# Altium PCB datn_pcb.PcbDoc
Units mm, origin at the board's own origin, x right, y up, seen from the top; angles counter-clockwise.
Board outline 105 x 90 mm, 2 copper layers (Top Layer, Bottom Layer); 49 components, 44 nets, 218 pads, 18 vias.
Unrouted connection lines stored in the file: 9.
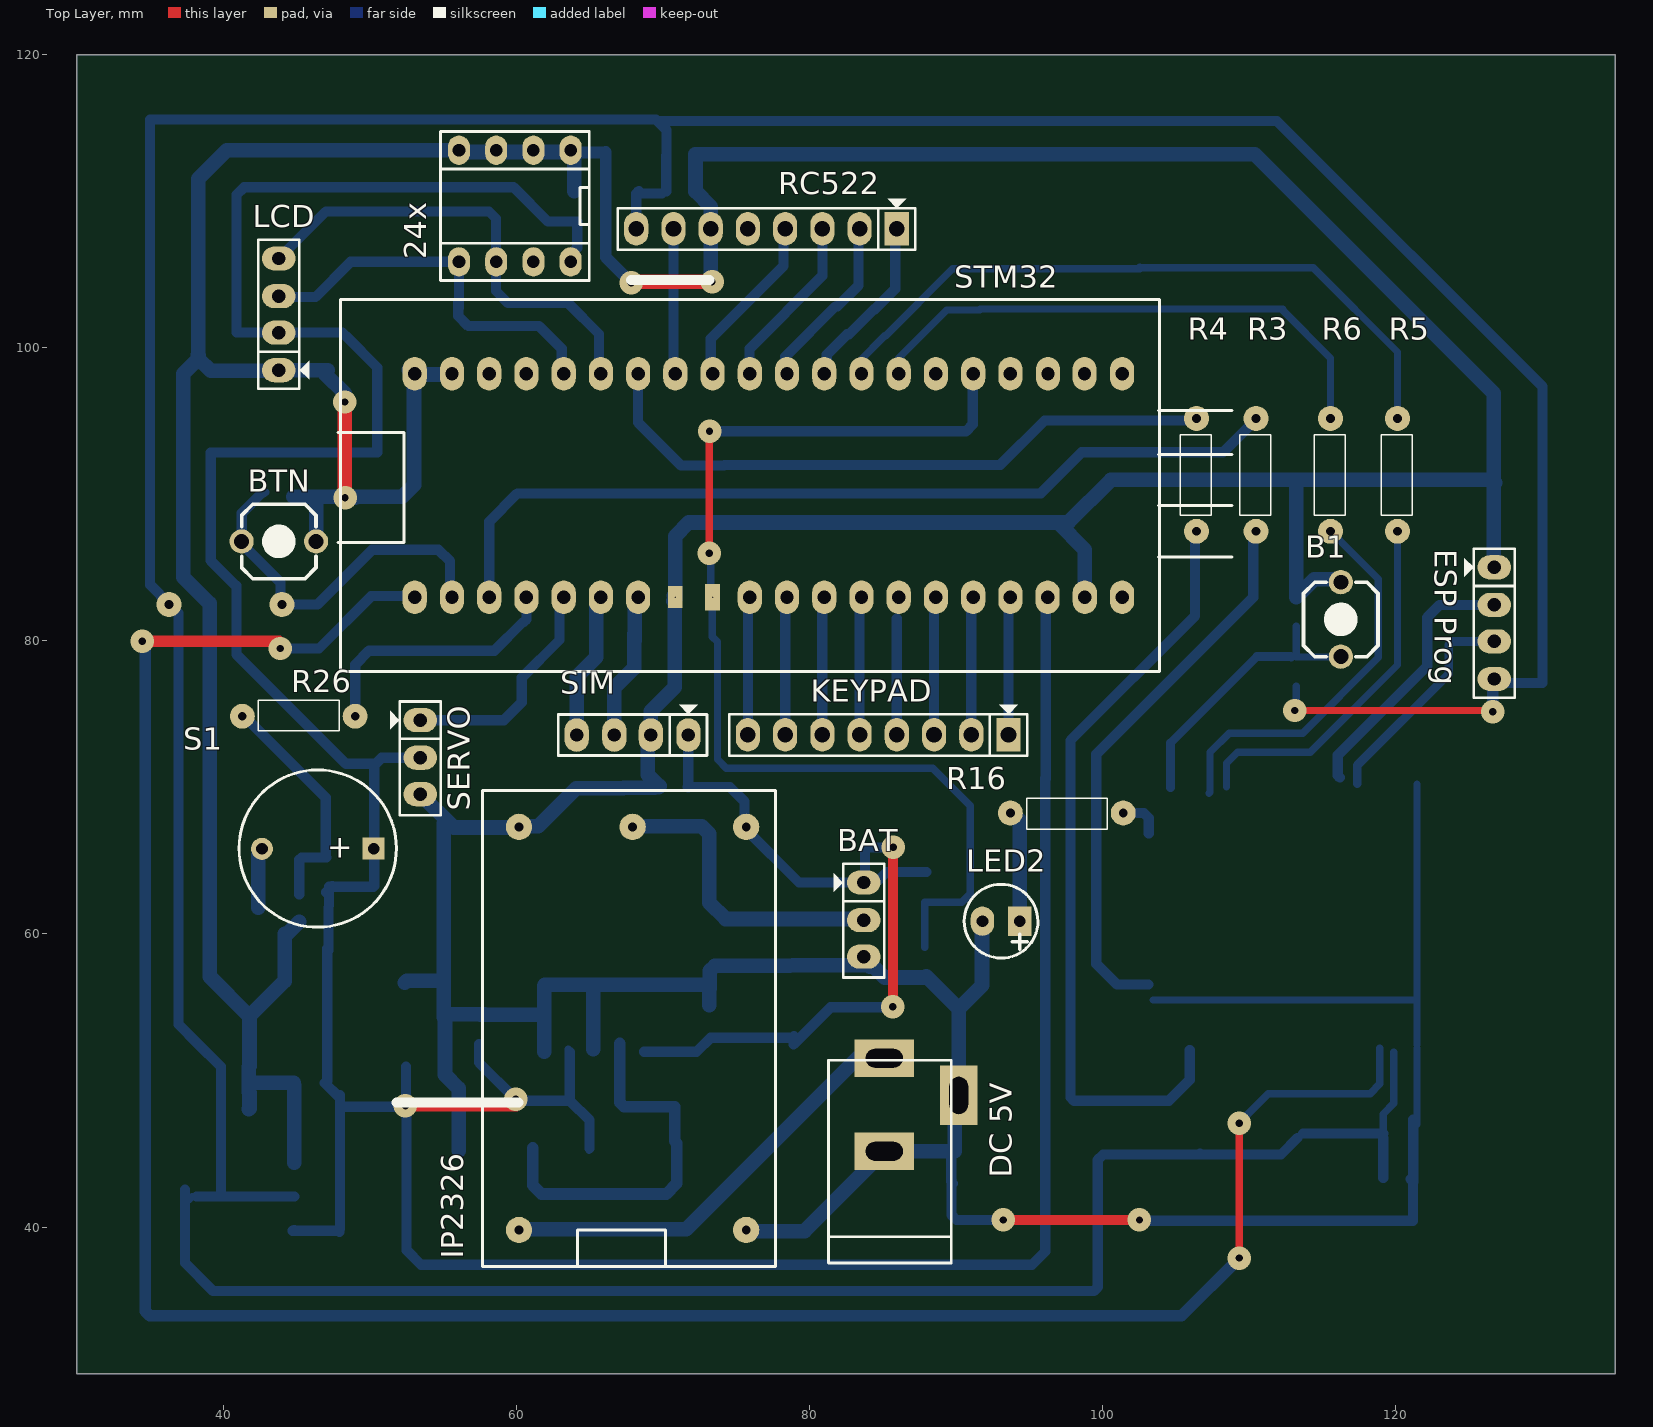
[diagram p0: Top Layer view]
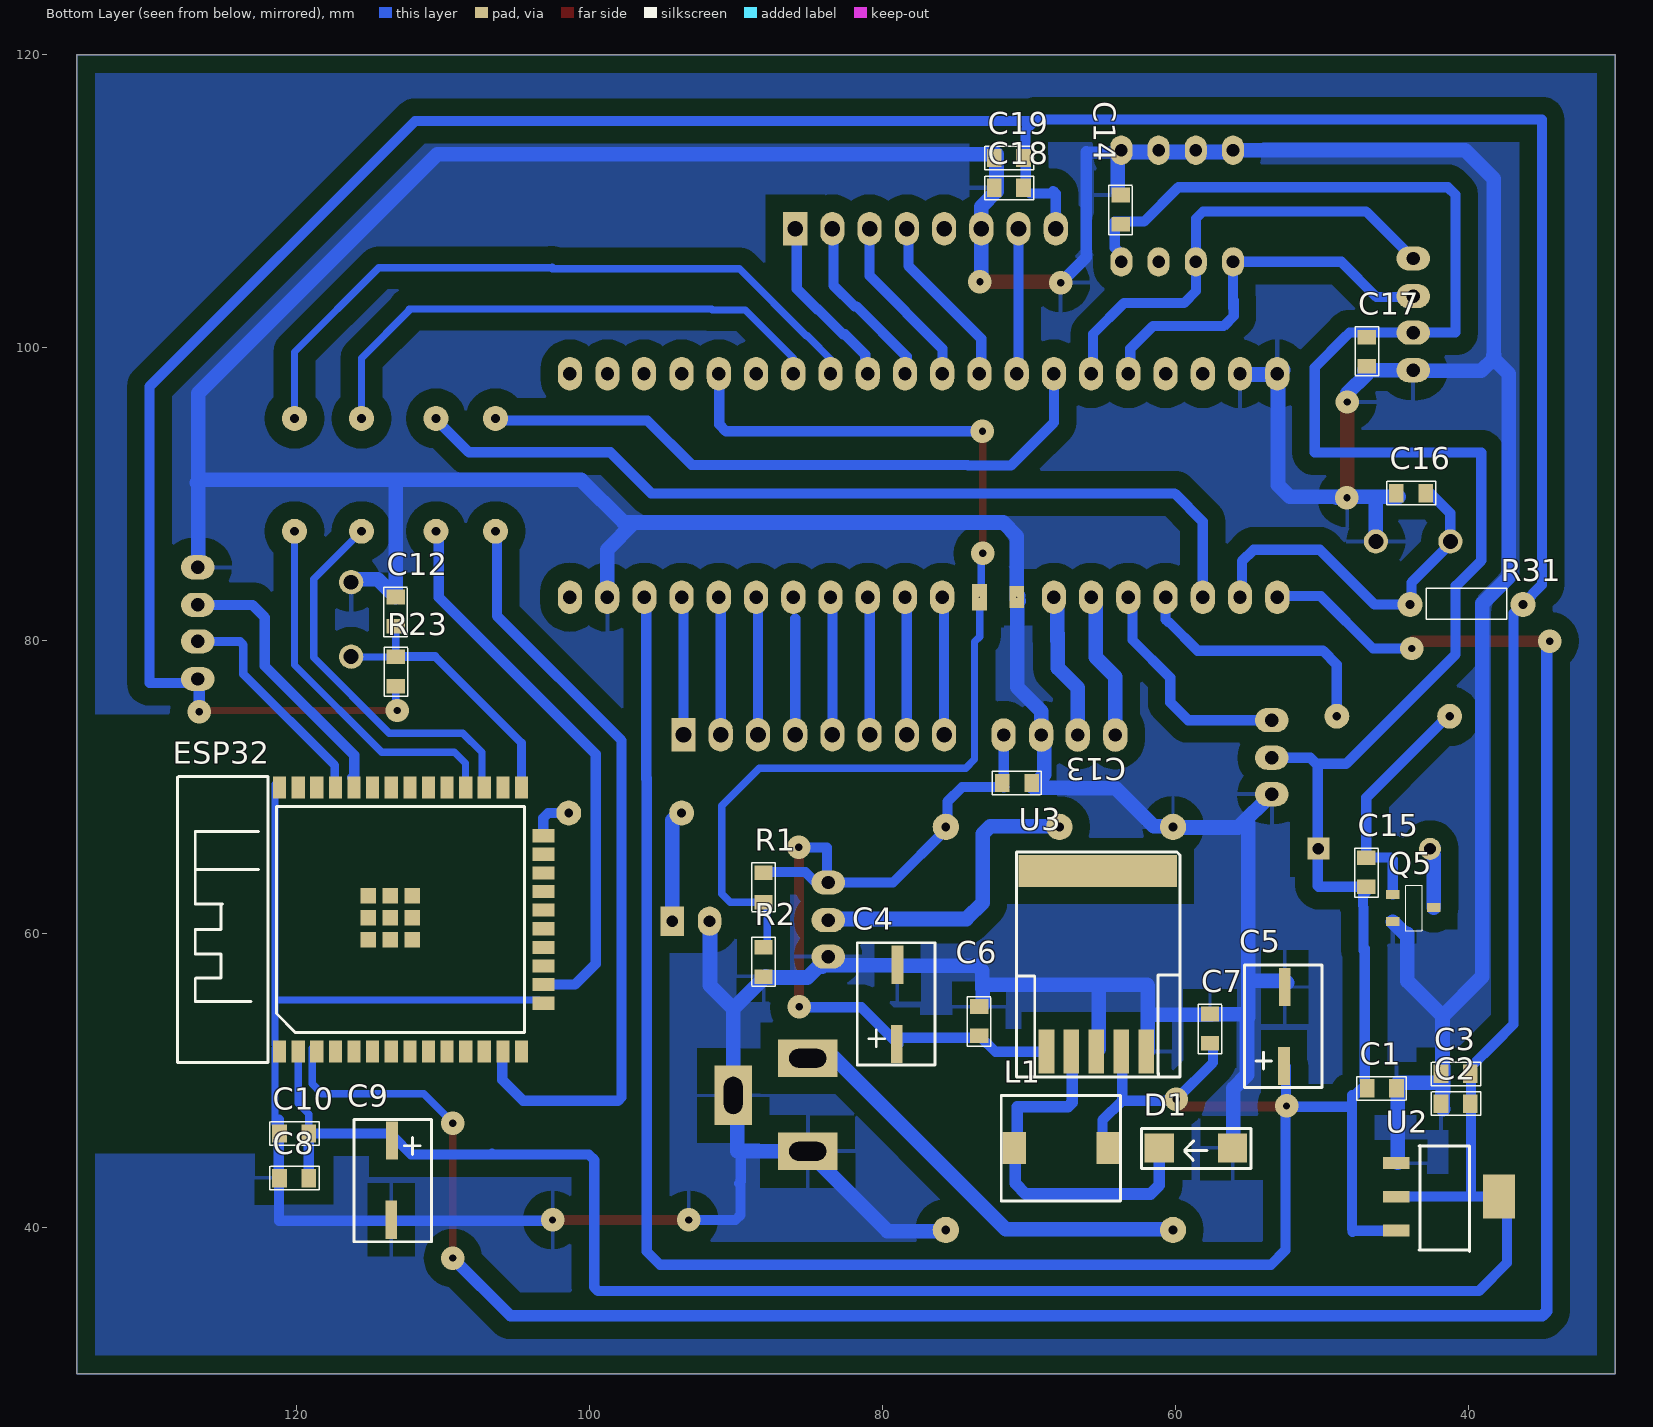
[diagram p1: Bottom Layer view, seen from below]
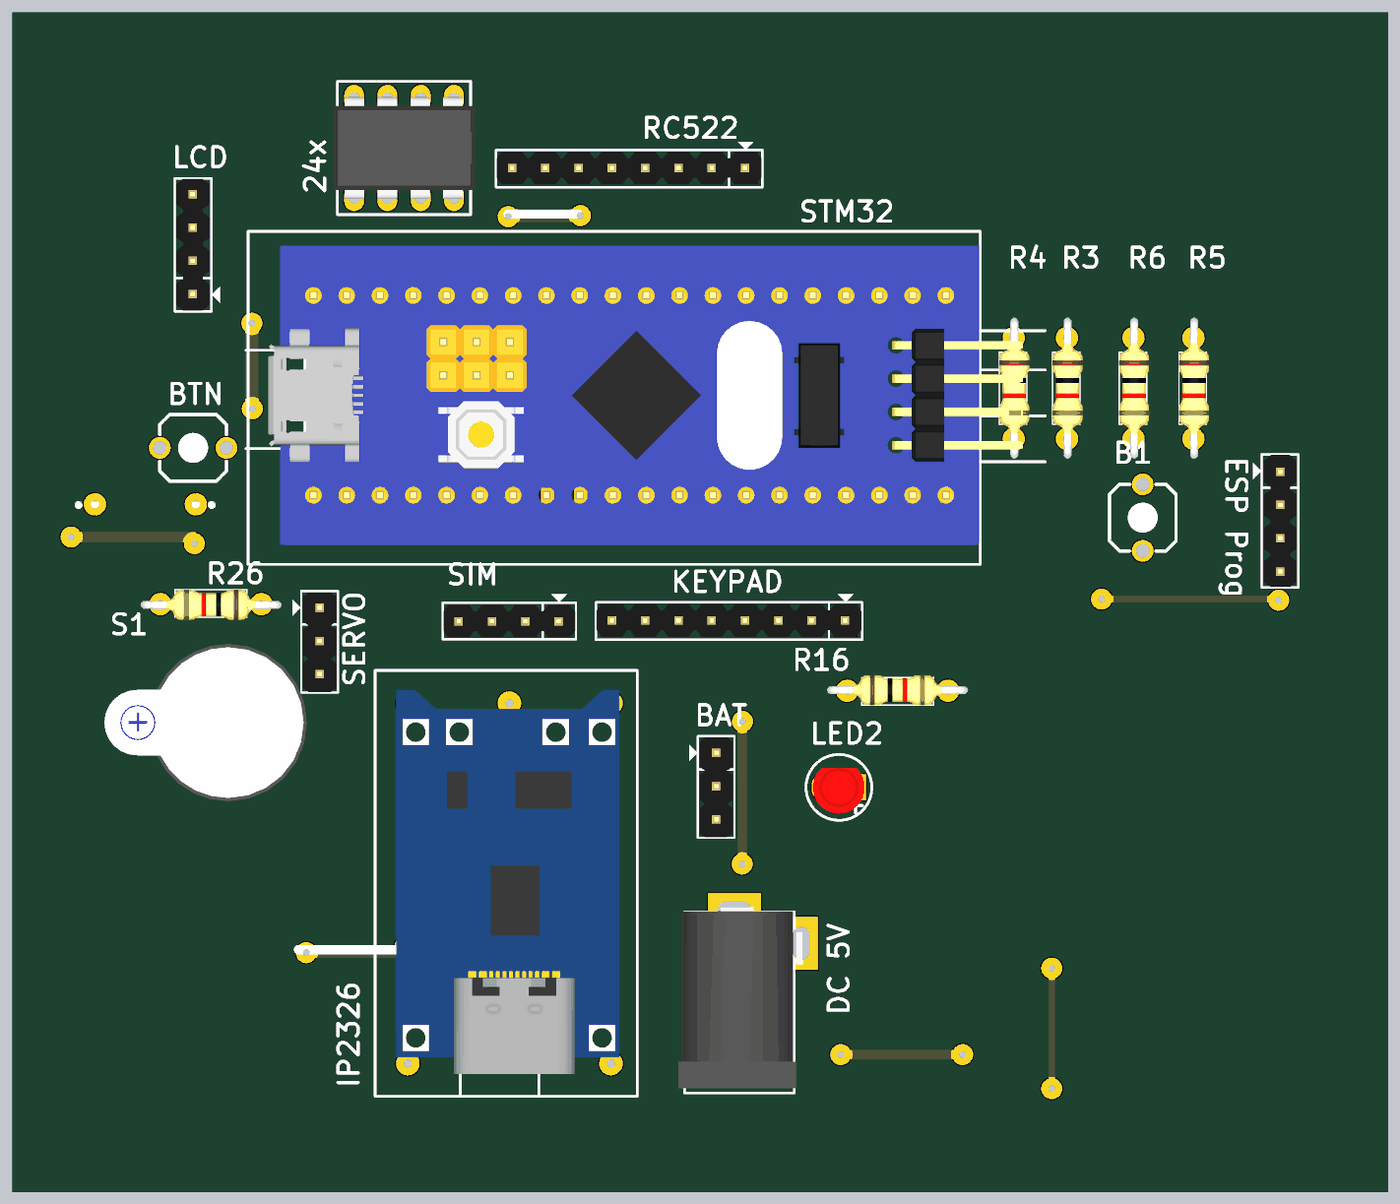
[diagram p2: 3D render of the assembled board from above, using the file's embedded part models]
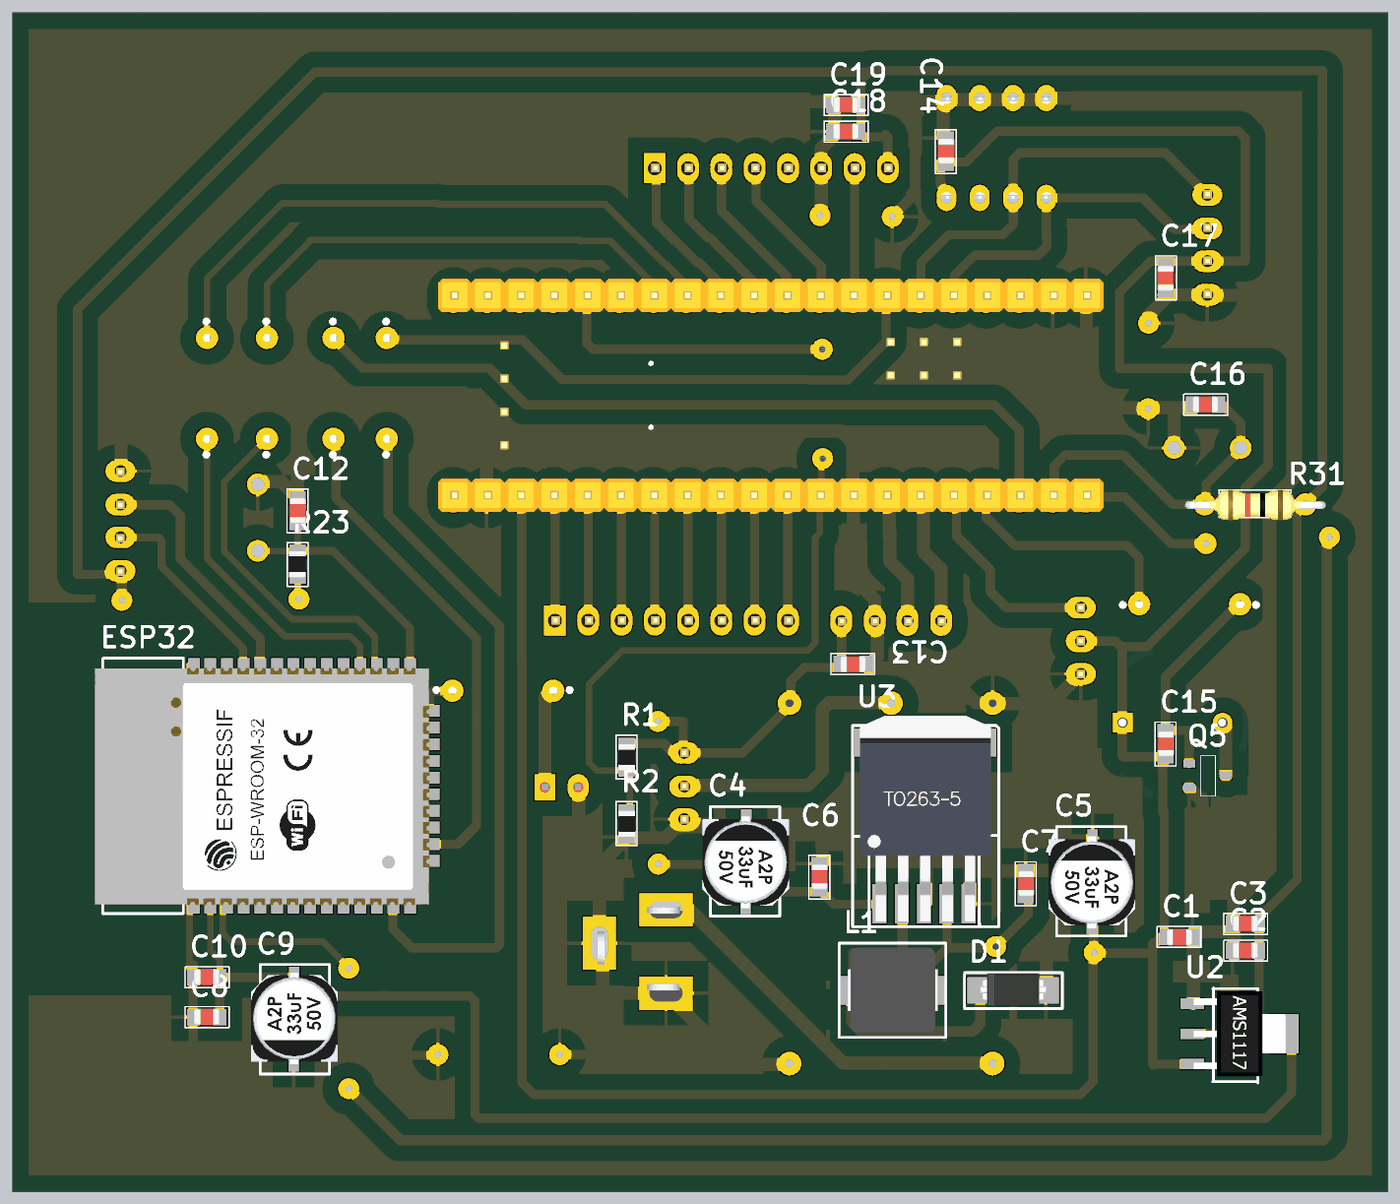
[diagram p3: 3D render of the assembled board from below, using the file's embedded part models]

## Layer stack, top to bottom
Top Layer: signal copper 0.0356
Dielectric: dielectric 0.32, FR-4, Dk 4.8
Bottom Layer: signal copper 0.0356

## Board outline
30,30 30,120 135,120 135,30

## Design rules (kind name [scope] priority, off if disabled: settings)
Clearance [All] p1: gap=1.2
PolygonConnect [All] p1: connectstyle=Relief reliefconductorwidth=0.254 reliefentries=4 polygonreliefangle="90 Angle"
RoutingLayers [All] p1: top layer_v5=FALSE bottom layer_v5=TRUE
RoutingVias [All] p1: holewidth=0.5 width=1.6 viastyle="Through Hole" minholewidth=0.5 minwidth=1.6 maxholewidth=0.5 maxwidth=1.6
SilkscreenOverComponentPads [All] p1: minsilkscreentomaskgap=0.254
SolderMaskExpansion [All] p1: expansion=0.102
Width [All] p1: maxlimit=1.2 minlimit=0.5 preferedwidth=0.7
26 further rules are at their usual default settings.

## Components (designator, comment, footprint, x,y, rotation, side; value= is the part's Value field where it differs from the comment)
24x "24Cxx" DIP8 59.902,109.663 r180 top (schematic designator U5)
B1 "Button" "Button 2 Pin" 116.262,81.456 r270 top
BAT "Jumper 3" JP3 83.716,60.967 r270 top
BTN "Button" "Button 2 Pin" 43.804,86.779 r180 top (schematic designator B3)
C1 "10uF" "cap 0805" 44.44,50.468 r0 bottom
C2 "10uF" "cap 0805" 42.408,47.42 r180 bottom
C3 "100nF" "cap 0805" 42.408,49.452 r180 bottom
C4 "10uF" "cap pol 63x54" 78.984,52.5 r90 bottom
C5 "10uF" "cap pol 63x54" 52.568,50.976 r90 bottom
C6 "10uF" "cap 0805" 74.412,55.548 r270 bottom
C7 "10uF" "cap 0805" 58.664,55.04 r270 bottom
C8 "10uF" "cap 0805" 121.656,42.34 r180 bottom
C9 "10uF" "cap pol 63x54" 113.528,45.896 r270 bottom
C10 "0.1uF" "cap 0805" 121.656,45.388 r180 bottom
C12 "10uF" "cap 0805" 114.23,83.488 r270 bottom
C13 "100nF" "cap 0805" 69.332,71.296 r0 bottom
C14 "0.1uF" "cap 0805" 64.76,110.92 r270 bottom
C15 "10uF" "cap 0805" 47.996,65.708 r270 bottom
C16 "10uF" "cap 0805" 45.456,89.076 r180 bottom
C17 "0.1uF" "cap 0805" 45.964,98.22 r90 bottom
C18 "10uF" "cap 0805" 72.888,109.904 r180 bottom
C19 "100nF" "cap 0805" 72.888,111.936 r180 bottom
D1 "SS34" "Diode SS34" 56.124,45.388 r0 bottom
"DC 5V" "JACK DC" "JACK DC" 85.24,42.679 r90 top (schematic designator J7)
ESP32 "ESP32 WROOM 38" "ESP32 WROOM 38" 121.148,51.992 r90 bottom (schematic designator U4)
"ESP Prog" "JP4" JP4 126.736,82.472 r270 top
IP2326 "MODULE IP2326" MACHSACPIN 60.188,39.8 r90 top (schematic designator U1)
KEYPAD "KEYPAD" JP8 93.588,73.597 r180 top (schematic designator J4)
L1 "220" "ind 74" 67.808,45.388 r180 bottom
LCD "JP4" JP4 43.804,101.003 r90 top
LED2 "LED3" LED3mm 93.08,60.871 r180 top
Q5 "C1815" "Trans SOT23" 45.198,62.691 r180 bottom
R1 "100k" "Res 0805" 88.128,63.168 r90 bottom
R2 "51k" "Res 0805" 88.128,58.088 r90 bottom
R3 "" "res 1/4w" 110.48,95.172 r270 top
R4 "" "res 1/4w" 106.416,95.172 r270 top
R5 "" "res 1/4w" 120.132,95.172 r270 top
R6 "" "res 1/4w" 115.56,95.172 r270 top
R16 "" "res 1/4w" 93.716,68.248 r0 top
R23 "10k" "Res 0805" 113.214,77.9 r270 bottom
R26 "Res1" "res 1/4w" 49.012,74.852 r180 top
R31 "Res1" "res 1/4w" 36.312,82.472 r0 bottom
RC522 "RC522" JP8 85.968,108.115 r180 top (schematic designator U8)
S1 "SPEAKER" SPEAKER 50.27,65.817 r180 top
SERVO "Jumper 3" JP3 53.456,72.047 r270 top
SIM "JP4" JP4 69.204,73.571 r180 top
STM32 "STM32F103C8T6 BLUEPILL" "STM32 BLUEPILL" 101.336,98.22 r270 top (schematic designator IC1)
U2 "ams1117" "ams1117 SOT223" 44.948,44.372 r270 bottom
U3 "LM2596" LM2596 68.824,51.992 r90 bottom

## Footprints (in the part's own frame and the unit in brackets; to place one, negate y for a bottom-side part, rotate by r counter-clockwise, add the part's x,y. Pads: shape width x height; smd on the part's side, far side on the other; paste and mask are expansions set on the pad)
"ams1117 SOT223" [mm]
  rect 0.8x1.8 smd: 1(0,0) 2(2.3,0) 3(4.6,0)
  rect 3x2.2 smd: 2(2.3,7)
  silkscreen extent -1.2,1.55 6.05,5, body extent -0.95,0.1 5.55,7.1, height 1.5
"Button 2 Pin" [mil] "Button 200mil 2 Pin"
  round 65 hole 40: 1(-100,0) 2(100,0)
  silkscreen extent -100,-100 100,100, body extent -105,-105 105,105, height 197
"cap 0805" [mm]
  rect 1x1.25 smd: 1(0.5,1) 2(2.5,1)
  silkscreen extent -0.15,0.2 3.2,1.8, body extent 0.5,0.4 2.5,1.65, height 0.78
"cap pol 63x54" [mm]
  rect 2.6x0.8 smd: 1(0,0.05) 2(5.4,0)
  silkscreen extent -1.45,-2.55 6.9,2.75, body extent -0.85,-3.25 6.15,3.35, height 7.88
"Diode SS34" [mm]
  rect 2x2 smd: 1(0,0) 2(5,0)
  silkscreen extent -1.25,-1.35 6.2,1.4, body extent -0.05,-1.3 5.05,1.2, height 2.41
DIP8 [mm] "W.300/L.400"
  oval 1.5x2 hole 0.864: 1(-3.81,-3.81) 2(-1.27,-3.81) 3(1.27,-3.81) 4(3.81,-3.81) 5(3.81,3.81) 6(1.27,3.81) 7(-1.27,3.81) 8(-3.81,3.81)
  silkscreen extent -5.08,-5.08 5.08,5.08, body extent -5.4,-3.88 5.4,3.88, height 4.5
"ESP32 WROOM 38" [mm]
  rect 1.5x0.9 smd: 1(0,0) 2(0,-1.27) 3(0,-2.54) 4(0,-3.81) 5(0,-5.08) 6(0,-6.35) 7(0,-7.62) 8(0,-8.89) 9(0,-10.16) 10(0,-11.43) 11(0,-12.7) 12(0,-13.97) 13(0,-15.24) 14(0,-16.51) 25(17.99,-16.51) 26(17.99,-15.24) 27(17.99,-13.97) 28(17.99,-12.7) 29(17.99,-11.43) 30(17.99,-10.16) 31(17.99,-8.89) 32(17.99,-7.62) 33(17.99,-6.35) 34(17.99,-5.08) 35(17.99,-3.81) 36(17.99,-2.54) 37(17.99,-1.27) 38(17.99,0)
  rect 0.9x1.5 smd: 15(3.28,-18.01) 16(4.55,-18.01) 17(5.82,-18.01) 18(7.09,-18.01) 19(8.36,-18.01) 20(9.63,-18.01) 21(10.9,-18.01) 22(12.17,-18.01) 23(13.44,-18.01) 24(14.71,-18.01)
  rect 1.05x1.05 smd: 39(7.6,-9.05) 39(7.6,-7.55) 39(7.6,-6.05) 39(9.1,-9.05) 39(9.1,-7.55) 39(9.1,-6.05) 39(10.6,-9.05) 39(10.6,-7.55) 39(10.6,-6.05)
  silkscreen extent -0.75,-16.73 18.75,6.95, body extent -0.1,-18 18,7.55, height 4.35
"ind 74" [mm]
  rect 1.6x2.2 smd: 1(-3.2,0) 2(3.2,0)
  silkscreen extent -4.1,-3.6 4.05,3.6, body extent -3.43,-3.22 3.43,3.25, height 2.9
"JACK DC" [mil]
  rect 100x160 hole 50 slot 100 at 90 deg: 1(348,5) 2(98,5)
  rect 160x100 hole 50 slot 100 at 0 deg: 3(248,-195)
  silkscreen extent -202,-175 343,155, body extent -187,-200 357,174, height 434
JP3 [mil] "Jumper 3"
  oval 65x90 hole 36: 1(-100,0) 2(1,0) 3(99,0)
  silkscreen extent -150,-81 155,55, body extent -146,-49 154,49, height 354
JP4 [mil] "Jumper 4"
  oval 65x90 hole 36: 1(-100,0) 2(1,0) 3(99,0) 4(200,0)
  silkscreen extent -150,-81 250,55, body extent -148,-48 248,50, height 354
JP8 [mil] "JP8"
  rect 65x90 hole 42: 1(0,0)
  oval 65x90 hole 42: 2(100,0) 3(200,0) 4(300,0) 5(400,0) 6(500,0) 7(600,0) 8(700,0)
  silkscreen extent -50,-80 750,57, body extent -48,-50 748,48, height 354
LED3mm [mm]
  rect 1.6x2 hole 0.8: 1(-1.27,0)
  oval 1.6x2 hole 0.8: 2(1.27,0)
  silkscreen extent -2.52,-2.51 2.51,2.52, body extent -1.99,-1.5 1.99,1.99, height 5.38
LM2596 [mm]
  rect 3x1.07 smd: 1(0,0) 2(0,-1.7) 3(0,-3.4) 4(0,-5.1) 5(0,-6.8)
  rect 2.16x10.8 smd: 6(12.3,-3.5)
  silkscreen extent -1.75,-9.1 13.6,2.05, body extent -1.33,-8.5 14.33,1.5, height 5.18
MACHSACPIN [mm]
  round 1.8 hole 0.6: 1(0,0) 2(0,-15.5) 3(27.5,0) 4(27.5,-7.75) 5(27.5,-15.5)
  silkscreen extent -2.5,-17.5 30,2.5, body extent -0.79,-16.12 28.49,0.9, height 4.2
"res 1/4w" [mm]
  round 1.7 hole 0.6: 1(0,0) 2(7.7,0)
  silkscreen extent 1.1,-1.1 6.6,1, body extent -1.55,-1.11 9.22,1.21, height 2.93
"Res 0805" [mm]
  rect 1x1.25 smd: 1(-1,0) 2(1,0)
  silkscreen extent -1.65,-0.8 1.7,0.8, body extent -1,-0.65 1,0.6, height 0.5
SPEAKER [mm]
  rect 1.5x1.5 hole 0.8: 1(0,0)
  round 1.5 hole 0.8: 2(7.62,0.013)
  silkscreen extent -1.55,-5.38 9.18,5.36, body extent -2.22,-6 13.24,6, height 4.5
"STM32 BLUEPILL" [mil]
  oval 90x65 hole 36: 1(0,0) 2(0,-101) 3(0,-199) 4(0,-300) 5(0,-400) 6(0,-500) 7(0,-600) 8(0,-700) 9(0,-800) 10(0,-900) 11(0,-1000) 12(0,-1100) 13(0,-1200) 14(0,-1300) 15(0,-1400) 16(0,-1500) 17(0,-1600) 18(0,-1700) 19(0,-1800) 20(0,-1900) 21(600,-1900) 22(600,-1800) 23(600,-1700) 24(600,-1600) 25(600,-1500) 26(600,-1400) 27(600,-1300) 30(600,-1000) 31(600,-900) 32(600,-800) 33(600,-700) 34(600,-600) 35(600,-500) 36(600,-400) 37(600,-300) 38(600,-200) 39(600,-100) 40(600,0)
  rect 59.06x39.37 hole 3.94: 28(600,-1200)
  rect 70.87x39.37 hole 3.94: 29(600,-1100)
  silkscreen extent -200,-2106 800,295, body extent -157,-2039 743,228, height 385
"Trans SOT23" [mm]
  rect 0.9x0.6 smd: 1(0,0) 2(0,-1.85) 3(2.8,-0.89)
  silkscreen extent 0.9,-2.5 2,0.6

## Part data
B1 BTN: library part "Button 2 Pin", "Button 2 pin"
BAT SERVO: library part JP3
C1 C2 C3 C6 C7 C8 C10 C12 C13 C14 C15 C16 C17 C18 C19: library part cap
C4 C5 C9: library part "cap pol"
IP2326: library part MACHSACPIN
L1: library part INDUCTOR
LED2: library part "LED 3mm", "LED 3mm"
Q5: library part "C1815 smd"
R1 R2 R23: library part res
R3 R4 R5 R6 R16: library part Res1, "Resistor"
R26 R31: "Resistor"

## Via types
v1: diameter 1.6, hole 0.5, Top Layer to Bottom Layer, 18 vias

## Nets (pads, with @x,y where several pads share a name; then routed paths per layer and width w, separated by ;. In a path a pad name is that pad's centre, name@x,y a point inside that pad or via, vN(x,y) a via of type N, cw(c..) or ccw(c..) an arc to the next point about the centre after c; other vN are vias at no path point)
3V3: "ESP Prog.4" C2.2 C3.2 C8.2 C9.1 C10.2 C18.2 C19.2 ESP32.2 R23.2 R31.1 RC522.8 U2.2 | length 340.4
  Top Layer w0.5: v1(113.12,75.244) 126.538,75.244 v1(126.633,75.149)
  Bottom Layer w0.5: U2.2@37.66,41.853 U2.2@37.892,42.085 ; C3.2@39.796,50.953 39.796,50.989 39.796,51.089 ; v1(113.12,75.244) 113.214,75.338 R23.2 ; C10.2 119.156,47.714 119.882,48.439 ESP32.2@119.882,51.937 ; 126.538,77.567 126.633,77.472
  Bottom Layer w0.7: R31.1@36.337,82.497 35.02,83.813 35.02,115.563 69.53,115.563 ; 36.96,81.873 36.96,53.825 38.28,52.505 ; U2.2@37.4,42.543 37.4,37.553 39.32,35.633 99.41,35.633 99.68,35.903 99.68,44.583 100.05,44.953 106.6,44.953 ; 38.13,52.655 38.28,52.505 ; U2.2@38.192,42.085 39.86,42.085 ; 38.28,52.475 38.28,52.505 ; C3.2@39.796,50.989 38.28,52.505 ; C3.2@39.86,50.953 39.86,42.085 ; U2.2@44.86,42.085 39.86,42.085 ; RC522.8 68.188,110.511 ; 68.37,110.693 68.188,110.511 ; C18.2@69.948,110.511 68.188,110.511 ; C18.2@70.236,110.655 C19.2@70.236,113.097 ; C19.2@70.26,112.993 70.26,114.833 69.63,115.463 111.89,115.463 130.026,97.327 130.026,77.127 126.736,77.127 ; 106.65,45.003 106.6,44.953 ; C9.1@113.308,46.084 112.178,44.953 106.6,44.953 ; C9.1@113.697,46.388 C10.2 ; C8.2 C10.2@119.156,46.084
  Bottom Layer w0.8: v1(126.633,75.149) 126.633,77.401 126.728,77.496
5V: 24x.8 C1.2 C5.1 C7.2 C14.2 C15.2 C17.2 L1.2 LCD.2 S1.1 SERVO.2 STM32.38 U2.3 U3.4 | length 262.9
  Top Layer w0.7: v1@52.98,48.223 v1@59.96,48.223
  Bottom Layer w0.5: U3.4@63.56,52.123 63.66,52.023 U3.4@63.66,51.923 ; L1.2@64.96,45.223 L1.2@64.96,45.359
  Bottom Layer w0.7: 40.91,83.773 40.91,83.123 ; U2.3@44.76,39.753 U2.3@44.828,39.753 ; U2.3@44.81,39.735 U2.3@44.828,39.753 ; U2.3@44.86,39.785 U2.3@44.828,39.753 ; C15.2@47.03,62.843 C15.2@47.23,63.043 ; 47.1,59.013 47.1,49.985 46.944,49.829 47.86,48.913 ; 47.19,58.893 47.19,61.793 ; 47.23,61.943 C15.2@47.23,63.043 ; C15.2@47.44,63.253 C15.2@47.402,63.215 ; 47.94,39.673 47.86,39.753 ; 47.97,49.013 47.97,48.213 ; 48.43,100.733 50.52,98.643 50.52,92.843 39.16,92.843 39.16,85.473 40.91,83.723 40.91,83.123 ; 48.54,100.633 48.145,101.029 LCD.2 40.916,101.029 40.916,110.429 41.44,110.953 59.82,110.953 62.17,108.603 64.16,108.603 64.16,106.823 24x.8@63.73,106.393 ; 50.45,71.643 50.829,72.022 SERVO.2 ; v1@52.44,48.213 47.97,48.213 ; v1(52.44,48.263) 52.52,48.183 52.52,38.413 53.5,37.433 95.19,37.433 96.09,38.333 96.09,70.565 ; v1@52.486,48.367 C5.1@52.486,50.945 ; C7.2@57.46,52.487 57.46,51.223 v1(59.96,48.723) ; v1@60.06,48.623 63.66,48.623 ; U3.4@63.66,51.923 63.66,48.623 ; L1.2@65.004,45.359 65.004,47.279 63.66,48.623 ; 96.09,70.643 96.09,70.565 ; STM32.38@96.128,82.715 96.128,70.565 96.09,70.565 ; 40.91,83.123 40.91,79.083 48.38,71.613 50.32,71.613 50.32,63.293 50.242,63.215 C15.2@47.402,63.215 ; U2.3@44.828,39.753 47.86,39.753 ; C15.2@47.23,63.043 C15.2@47.402,63.215 ; C15.2@47.23,63.043 47.23,63.215 C15.2@47.402,63.215 ; 47.86,39.753 47.97,39.863 47.97,48.213
"BAT ADC": R1.1 R2.2 STM32.5 STM32.29 | length 75.6
  Top Layer w0.5: v1(73.16,85.963) 73.16,94.123 73.19,94.153 v1(73.19,94.303)
  Bottom Layer w0.5: v1(73.16,85.963) 73.16,85.803 73.268,85.695 STM32.29@73.268,82.715 ; v1(73.19,94.303) v1@73.34,94.453 ; STM32.29@73.384,82.996 73.384,80.27 73.73,79.924 73.73,71.913 74.33,71.313 88.42,71.313 90.98,68.753 90.98,62.743 90.4,62.163 R1.1@87.872,62.163 ; R2.2@87.872,59.083 R1.1@87.872,62.115
  Bottom Layer w0.7: v1(73.19,94.303) 90.694,94.303 91.152,94.762 STM32.5@91.152,98.22
BTN: BTN.2 C16.2 R31.2 STM32.22 | length 25.9
  Bottom Layer w0.5: BTN.2@41.264,86.449 41.264,86.63 BTN.2 ; C16.2@42.784,90.027 C16.2@42.9,90.143 ; R31.2@43.86,82.293 R31.2@43.86,82.472 ; STM32.22@55.46,82.963 STM32.22@55.46,82.98
  Bottom Layer w0.7: BTN.2@41.241,86.653 41.264,86.63 43.911,83.984 43.911,82.573 R31.2 46.436,82.472 50.184,86.22 54.688,86.22 55.489,85.419 STM32.22@55.489,82.783 ; BTN.2 41.264,88.7 C16.2@42.688,90.123
BUZZ: R26.1 STM32.24 | length 17.8
  Bottom Layer w0.7: R26.1 49.012,78.375 49.95,79.313 58.492,79.313 60.427,81.248 ; 60.532,81.286 60.694,81.448 STM32.24@60.694,82.85
"DOOR STATUS": R3.1 STM32.23 | length 60.5
  Bottom Layer w0.5: STM32.23@58.1,82.853 STM32.23@58.1,82.98 ; 60.046,90.019 60.08,90.053
  Bottom Layer w0.7: STM32.23 58.156,88.134 60.044,90.021 ; 60.08,90.053 95.782,90.053 98.593,92.864 108.23,92.864 R3.1@110.495,95.129
"EN WF": ESP32.3 STM32.21 | length 164.8
  Top Layer w0.5: v1(109.32,37.883) v1(109.32,47.073)
  Top Layer w0.8: v1(34.49,79.973) 43.79,79.973 v1@43.99,79.773
  Bottom Layer w0.5: v1(109.32,47.073) 109.32,47.113 111.31,49.103 118.26,49.103 118.924,49.767 ESP32.3@118.924,52.213
  Bottom Layer w0.7: v1(43.9,79.473) 46.54,79.473 50.117,83.05 STM32.21@53.053,83.05
  Bottom Layer w0.8: v1(34.49,79.973) 34.69,79.773 34.69,34.263 35,33.953 105.39,33.953 v1(109.32,37.883)
"ESP RX": "ESP Prog.2" ESP32.34 | length 18.4
  Bottom Layer w0.7: ESP32.34@116.202,70.668 116.059,70.81 116.059,72.185 122.152,78.278 122.152,81.597 123.002,82.447 126.736,82.447
"ESP TX": "ESP Prog.3" ESP32.35 | length 15.3
  Bottom Layer w0.6: ESP32.35@117.387,70.265 117.387,71.498 123.622,77.733 123.622,79.724 123.855,79.957 126.736,79.957
FLASH: B1.2 C12.2 ESP32.25 R23.1 | length 18.7
  Bottom Layer w0.5: R23.1 B1.2@116.262,78.9 ; R23.1@113.23,79.07 C12.2
  Bottom Layer w0.6: ESP32.25 104.638,73.025 110.543,78.931 112.845,78.931 R23.1@112.885,78.89
GND: 24x.1 24x.2 24x.3 24x.4 "DC 5V.2" "DC 5V.3" "ESP Prog.1" B1.1 BAT.3 BTN.1 C1.1 C2.1 C3.1 C4.2 C5.2 C6.1 C7.1 C8.1 C9.2 C10.1 C12.1 C13.1 C14.1 C16.1 C17.1 C18.1 C19.1 D1.1 ESP32.1 ESP32.15 ESP32.38 ESP32.39 IP2326.2 IP2326.3 LCD.1 LED2.2 Q5.2 R2.1 RC522.6 SERVO.3 SIM.2 STM32.19 STM32.20 STM32.28 STM32.39 U2.1 U3.3 U3.5 | length 558.6
  Top Layer w0.7: v1(93.22,40.483) v1(102.52,40.483)
  Top Layer w1: v1(48.29,96.293) 48.29,89.793 v1(48.32,89.763) ; v1(67.85,104.423) 67.93,104.503 v1(73.36,104.503)
  Bottom Layer w0.5: 61.724,54.487 61.912,54.487 ; 61.912,56.675 65.808,56.675 ; U3.3@65.312,51.963 U3.3@65.312,52.123 ; C4.2@78.66,57.871 C4.2@78.872,57.871 ; BAT.3@83.68,58.523 BAT.3@84.18,58.523 ; ESP32.15@103.454,55.493 121.22,55.493 ; 121.464,47.017 ESP32.1@121.464,52.213 ; ESP32.1@121.464,52.443 ESP32.38@121.464,70.203
  Bottom Layer w0.7: 89.68,45.093 89.68,43.103 89.69,43.093 ; 89.69,43.193 89.69,43.093 ; 89.804,42.979 89.69,43.093 ; v1(93.22,40.483) 90.04,40.483 89.69,40.833 89.69,43.093 ; v1(102.52,40.483) 102.574,40.429 121.18,40.429 121.18,43.061 C8.1@121.206,43.087 ; C8.1@121.01,43.283 C8.1@121.206,43.087 ; 121.18,47.323 121.206,47.297 C8.1@121.206,43.087
  Bottom Layer w0.8: 24x.1@63.75,113.313 66.06,113.313 66.1,113.353 66.1,106.173 v1(67.85,104.423)
  Bottom Layer w1: 38.28,99.523 38.3,99.503 ; C3.1@41.75,50.943 41.75,49.219 41.796,49.173 41.796,48.089 C2.1@41.76,48.053 ; C3.1@41.796,49.853 C1.1@44.83,49.853 ; C3.1@41.796,50.989 41.796,54.389 ; LCD.1@43.64,98.413 39.16,98.413 38.32,99.253 ; LCD.1 C17.1@47.12,98.463 ; 44.2,59.993 44.2,56.793 41.796,54.389 ; 44.27,59.913 Q5.2 ; C16.1@44.804,89.827 46.344,89.827 ; U2.1@44.86,44.385 C1.1@44.86,49.653 ; BTN.1 46.344,89.827 ; C17.1@46.94,98.223 48.29,96.873 v1(48.29,96.293) ; v1(48.32,89.763) 49.006,89.763 49.07,89.827 52.224,89.827 53.03,90.633 STM32.20@53.03,98.053 ; v1@48.32,89.827 46.344,89.827 ; C5.2@52.4,56.673 52.53,56.803 55.06,56.803 ; STM32.20@52.664,98.479 52.97,98.173 STM32.19@55.59,98.173 ; SERVO.3 55.726,67.263 IP2326.3@60.44,67.263 ; 55.06,54.323 55.06,56.803 ; 55.22,67.693 55.06,67.533 55.06,56.803 ; D1.1@56.084,45.215 56.084,49.449 55.14,50.393 55.14,54.403 55.26,54.523 C7.1@57.86,54.523 ; C7.1@57.536,54.487 61.724,54.487 ; IP2326.3@60.256,67.343 61.5,67.343 64.09,69.933 67.31,69.933 67.34,69.963 C13.1@69.45,69.963 ; U3.5@61.912,51.963 61.912,54.487 61.912,56.475 61.96,56.523 65.26,56.523 ; C14.1@63.966,110.663 24x.1@63.966,112.857 ; 24x.1@64.03,113.353 56.212,113.353 24x.4 40.25,113.473 38.3,111.523 38.3,99.503 ; U3.3@65.26,52.123 65.26,56.523 ; SIM.2@68.98,73.513 68.98,70.853 69.728,70.105 C13.1@69.728,70.093 ; SIM.2 69.179,75.182 70.824,76.827 70.824,82.99 STM32.28@70.74,83.073 ; C13.1@69.728,70.015 C13.1@69.728,70.093 ; C13.1@69.78,70.093 C13.1@69.728,70.093 ; STM32.28@70.728,82.715 70.847,82.834 70.847,87.14 71.78,88.073 96.94,88.073 ; C18.1@72.236,110.655 73.28,109.611 RC522.6@73.28,108.233 ; C18.1@72.236,110.857 C19.1@72.236,113.195 ; C19.1@72.24,113.203 110.38,113.203 126.694,96.89 126.694,90.874 ; C6.1@73.16,55.123 73.16,56.323 72.96,56.523 65.26,56.523 ; 73.212,56.271 73.212,57.471 73.564,57.823 C4.2@78.66,57.823 ; RC522.6 73.268,104.595 v1(73.36,104.503) ; IP2326.2@75.37,39.773 75.42,39.723 79.668,39.723 85.113,45.168 89.925,45.168 89.925,49.078 89.88,49.123 ; C4.2@78.872,57.871 84.032,57.871 BAT.3@84.13,57.773 ; BAT.3@84.263,57.906 85.146,57.023 R2.1@87.98,57.023 ; 85.069,45.212 85.08,45.223 ; R2.1@87.98,57.123 90.193,54.91 ; 90.193,48.978 90.193,54.91 ; LED2.2@91.78,61.023 91.78,56.497 90.193,54.91 ; STM32.39@98.636,82.979 98.791,83.134 98.791,86.223 96.94,88.073 ; STM32.39@98.668,82.715 STM32.39@98.668,82.98 ; 113.644,90.978 113.23,90.978 ; B1.1@116.385,83.98 116.165,84.2 114.441,84.2 C12.1 113.23,90.978 ; 126.694,85.849 126.694,90.874 ; 126.793,90.774 126.694,90.874 ; 38.3,99.503 38.32,99.483 38.32,99.253 ; 38.3,99.503 38.3,99.273 38.32,99.253 ; 38.32,99.253 37.29,98.223 37.29,84.343 39.09,82.543 39.09,57.095 41.796,54.389 ; 96.94,88.073 97.677,88.073 100.582,90.978 113.23,90.978 ; 113.23,90.978 113.23,90.991 126.577,90.991 126.694,90.874
K_C1: KEYPAD.5 STM32.33 | length 9.2
  Bottom Layer w0.7: KEYPAD.5 83.428,82.715 STM32.33@83.428,82.765
K_C2: KEYPAD.6 STM32.32 | length 8.5
  Bottom Layer w0.7: KEYPAD.6 STM32.32@80.888,82.141
K_C3: KEYPAD.7 STM32.31 | length 9.8
  Bottom Layer w0.7: KEYPAD.7 78.348,82.715 STM32.31@78.348,83.445
K_C4: KEYPAD.8 STM32.30 | length 8.8
  Bottom Layer w0.7: KEYPAD.8 STM32.30@75.808,82.355
K_R1: KEYPAD.1 STM32.37 | length 8.7
  Bottom Layer w0.7: KEYPAD.1 STM32.37@93.588,82.305
K_R2: KEYPAD.2 STM32.36 | length 8.7
  Bottom Layer w0.7: KEYPAD.2 STM32.36@91.048,82.345
K_R3: KEYPAD.3 STM32.35 | length 8.9
  Bottom Layer w0.7: KEYPAD.3 STM32.35@88.508,82.465
K_R4: KEYPAD.4 STM32.34 | length 7.9
  Bottom Layer w0.7: KEYPAD.4 85.968,81.515
KEY: SERVO.1 STM32.25 | length 14.6
  Bottom Layer w0.7: SERVO.1 59.044,74.587 ; 59.144,74.587 60.37,75.813 60.37,77.473 62.95,80.053 STM32.25@62.95,81.983
NetBAT_2: BAT.2 IP2326.4 | length 21
  Bottom Layer w1: IP2326.4@68.006,67.343 72.66,67.343 73.18,66.823 73.18,62.123 74.28,61.023 BAT.2@83.68,61.023
NetC15_1: C15.1 Q5.1 R26.2 | length 16.4
  Bottom Layer w0.7: R26.2@41.506,75.06 41.506,74.787 43.622,72.672 46.996,69.297 C15.1@46.996,65.213 ; Q5.1 45.198,65.052 45.359,65.213 C15.1@46.996,65.213 ; C15.1 C15.1@46.996,65.213 ; C15.1@47.063,65.213 C15.1@46.996,65.213
NetD1_2: D1.2 L1.1 U3.2 | length 26.1
  Bottom Layer w0.8: D1.2 61.124,42.854 61.729,42.25 70.228,42.25 70.955,42.977 70.955,45.722 70.813,45.864 70.813,48.217 67.355,48.217 67.07,48.502 U3.2@67.07,52.53
NetLED2_1: LED2.1 R16.1 | length 7.8
  Bottom Layer w1: R16.1@93.73,68.373 94.35,67.753 LED2.1
NetQ5_3: Q5.3 S1.2 | length 3.8
  Bottom Layer w1: Q5.3 42.398,65.411 S1.2@42.48,65.493 ; S1.2@42.398,65.841 S1.2@42.47,65.913
NetR3_2: ESP32.16 R3.2 | length 37.9
  Bottom Layer w0.7: ESP32.16 100.999,56.542 99.57,57.971 99.57,72.253 110.294,82.977 110.294,86.97 R3.2@110.518,87.194
NetR4_2: ESP32.13 R4.2 | length 52.9
  Bottom Layer w0.7: ESP32.13@105.95,52.08 105.95,50.049 104.525,48.623 98.05,48.623 97.82,48.853 97.82,73.203 106.318,81.701 106.318,87.246 R4.2@106.221,87.343
NetR5_2: ESP32.28 R5.2 | length 25.2
  Bottom Layer w0.5: ESP32.28@108.459,70.046 108.459,71.643 109.215,72.398 114.186,72.398 120.132,78.344 R5.2
NetR6_2: ESP32.27 R6.2 | length 26.9
  Bottom Layer w0.5: ESP32.27@107.271,69.605 107.338,69.673 107.338,72.39 108.651,73.702 113.665,73.702 118.82,78.858 118.82,84.212 R6.2
NetR16_2: ESP32.24 R16.2 | length 2.8
  Bottom Layer w0.7: R16.2@101.59,68.248 102.819,68.248 103.159,67.908 ESP32.24@103.159,66.863
RF_MISO: RC522.3 STM32.11 | length 12.3
  Bottom Layer w0.7: STM32.11@75.808,97.955 75.92,98.067 75.92,99.923 80.89,104.893 RC522.3@80.89,108.163
RF_MOSI: RC522.4 STM32.12 | length 12.3
  Bottom Layer w0.7: STM32.12@73.268,97.955 73.268,100.611 78.24,105.583 RC522.4@78.24,108.203
RF_RST: RC522.7 STM32.13 | length 10
  Bottom Layer w0.7: STM32.13@70.728,98.071 RC522.7
RF_SCK: RC522.2 STM32.10 | length 12.5
  Bottom Layer w0.7: STM32.10@78.348,97.955 78.348,99.376 81.785,102.813 81.921,102.813 83.36,104.252 RC522.2@83.36,108.323
RF_SS: RC522.1 STM32.9 | length 12.4
  Bottom Layer w0.7: STM32.9@80.888,97.955 80.888,98.801 81.181,99.093 81.181,99.521 82.572,100.913 82.708,100.913 84.408,102.613 84.462,102.613 85.86,104.011 RC522.1@85.86,108.163
RX1: SIM.3 STM32.27 | length 10.3
  Bottom Layer w1: SIM.3 66.69,76.784 68.05,78.144 68.05,80.463 ; 68.08,80.023 STM32.27@68.08,82.823
RX2: R5.1 STM32.8 | length 47.4
  Bottom Layer w0.5: STM32.8@83.428,97.955 83.428,99.088 85.153,100.813 85.208,100.813 89.768,105.373 102.544,105.373 ; 102.544,105.484 102.586,105.442 114.388,105.442 120.132,99.699 R5.1
SCL: 24x.6 LCD.4 STM32.15 | length 32.3
  Bottom Layer w0.7: LCD.4 47.014,109.293 58.14,109.293 58.62,108.813 24x.6@58.62,106.183 ; 24x.6@58.62,105.983 58.62,103.863 59.44,103.043 63.54,103.043 65.648,100.935 STM32.15@65.648,97.955
SDA: 24x.5 LCD.3 STM32.16 | length 27.4
  Bottom Layer w0.7: LCD.3@43.78,103.453 46.31,103.453 48.71,105.853 24x.5 56.092,102.725 ; 56.05,103.203 56.05,102.163 56.74,101.473 61.56,101.473 63.108,99.925 STM32.16@63.108,97.955
TX1: SIM.4 STM32.26 | length 10
  Bottom Layer w1: SIM.4 64.124,77.537 65.46,78.873 65.46,82.993 STM32.26@65.49,83.023
TX2: R6.1 STM32.7 | length 37.4
  Bottom Layer w0.5: STM32.7 86.096,99.297 89.373,102.574 91.648,102.574 ; 91.648,102.633 112.288,102.633 ; 112.288,102.544 115.56,99.272 R6.1
VBAT: BAT.1 C4.1 C6.2 C13.2 IP2326.5 R1.2 SIM.1 U3.1 | length 57.5
  Top Layer w0.7: v1(85.7,55.023) 85.709,55.032 85.709,61.645 85.7,61.654 85.7,65.883 v1(85.72,65.903)
  Bottom Layer w0.7: U3.1@68.712,51.963 72.3,51.963 73.26,52.923 78.86,52.923 C4.1@78.96,53.023 ; C13.2@71.68,70.023 C13.2@71.728,70.023 ; C13.2@71.728,70.015 C13.2@71.728,70.023 ; SIM.1@71.728,73.865 C13.2@71.728,70.023 ; C4.1@78.922,52.471 81.454,55.003 85.68,55.003 v1(85.7,55.023) ; BAT.1@83.82,63.963 83.8,63.983 83.8,65.903 v1(85.72,65.903) ; R1.2@87.98,64.223 85.28,64.223 84.564,63.507 BAT.1 79.296,63.507 75.58,67.223 75.58,69.023 74.58,70.023 C13.2@71.728,70.023
VCC: "DC 5V.1" IP2326.1 | length 29.7
  Bottom Layer w1: IP2326.1@60.256,39.843 71.61,39.843 83.35,51.583 84.51,51.583 ; 84.51,51.518 85.113,51.518
"WF STATUS": R4.1 STM32.14 | length 44.1
  Bottom Layer w0.7: STM32.14 68.316,94.889 71.252,91.953 74.164,91.953 74.211,92.001 93.021,92.001 96.046,95.025 106.416,95.025 R4.1@106.623,95.025
pads on no net: 24x.7 ESP32.4 ESP32.5 ESP32.6 ESP32.7 ESP32.8 ESP32.9 ESP32.10 ESP32.11 ESP32.12 ESP32.14 ESP32.17 ESP32.18 ESP32.19 ESP32.20 ESP32.21 ESP32.22 ESP32.23 ESP32.26 ESP32.29 ESP32.30 ESP32.31 ESP32.32 ESP32.33 ESP32.36 ESP32.37 RC522.5 STM32.1 STM32.2 STM32.3 STM32.4 STM32.6 STM32.17 STM32.18 STM32.40 U3.6
copper on no net: | length 390
  Bottom Layer w0.1: 30,30 135,30 135,120 30,120 30,30

## Polygon pours and split planes (outlines as drawn)
GND on Bottom Layer "topoly" (solid, remove dead copper, pour order 1000): 30,120 135,120 135,75 95,75 95,45 135,45 135,30 30,30 30,120

## Silkscreen, mask and mechanical layers (free items; w line width, h text height)
Top Overlay:
  lines w0.7: 51.84,48.493 60.16,48.493 ; 67.84,104.613 73.18,104.613

## Text inside footprints (layer, text, board x,y; h text height)
S1: Top Overlay "+" at 48.861,66.528 h1.52 r180